# Altium PCB PCB_CSN_V5_dig.PcbDoc
Units mm, origin at the board's own origin, x right, y up, seen from the top; angles counter-clockwise.
Board outline 50 x 55 mm, 4 copper layers (Top Layer, GP1, PotSig, Bottom Layer); 50 components, 64 nets, 218 pads, 63 vias.
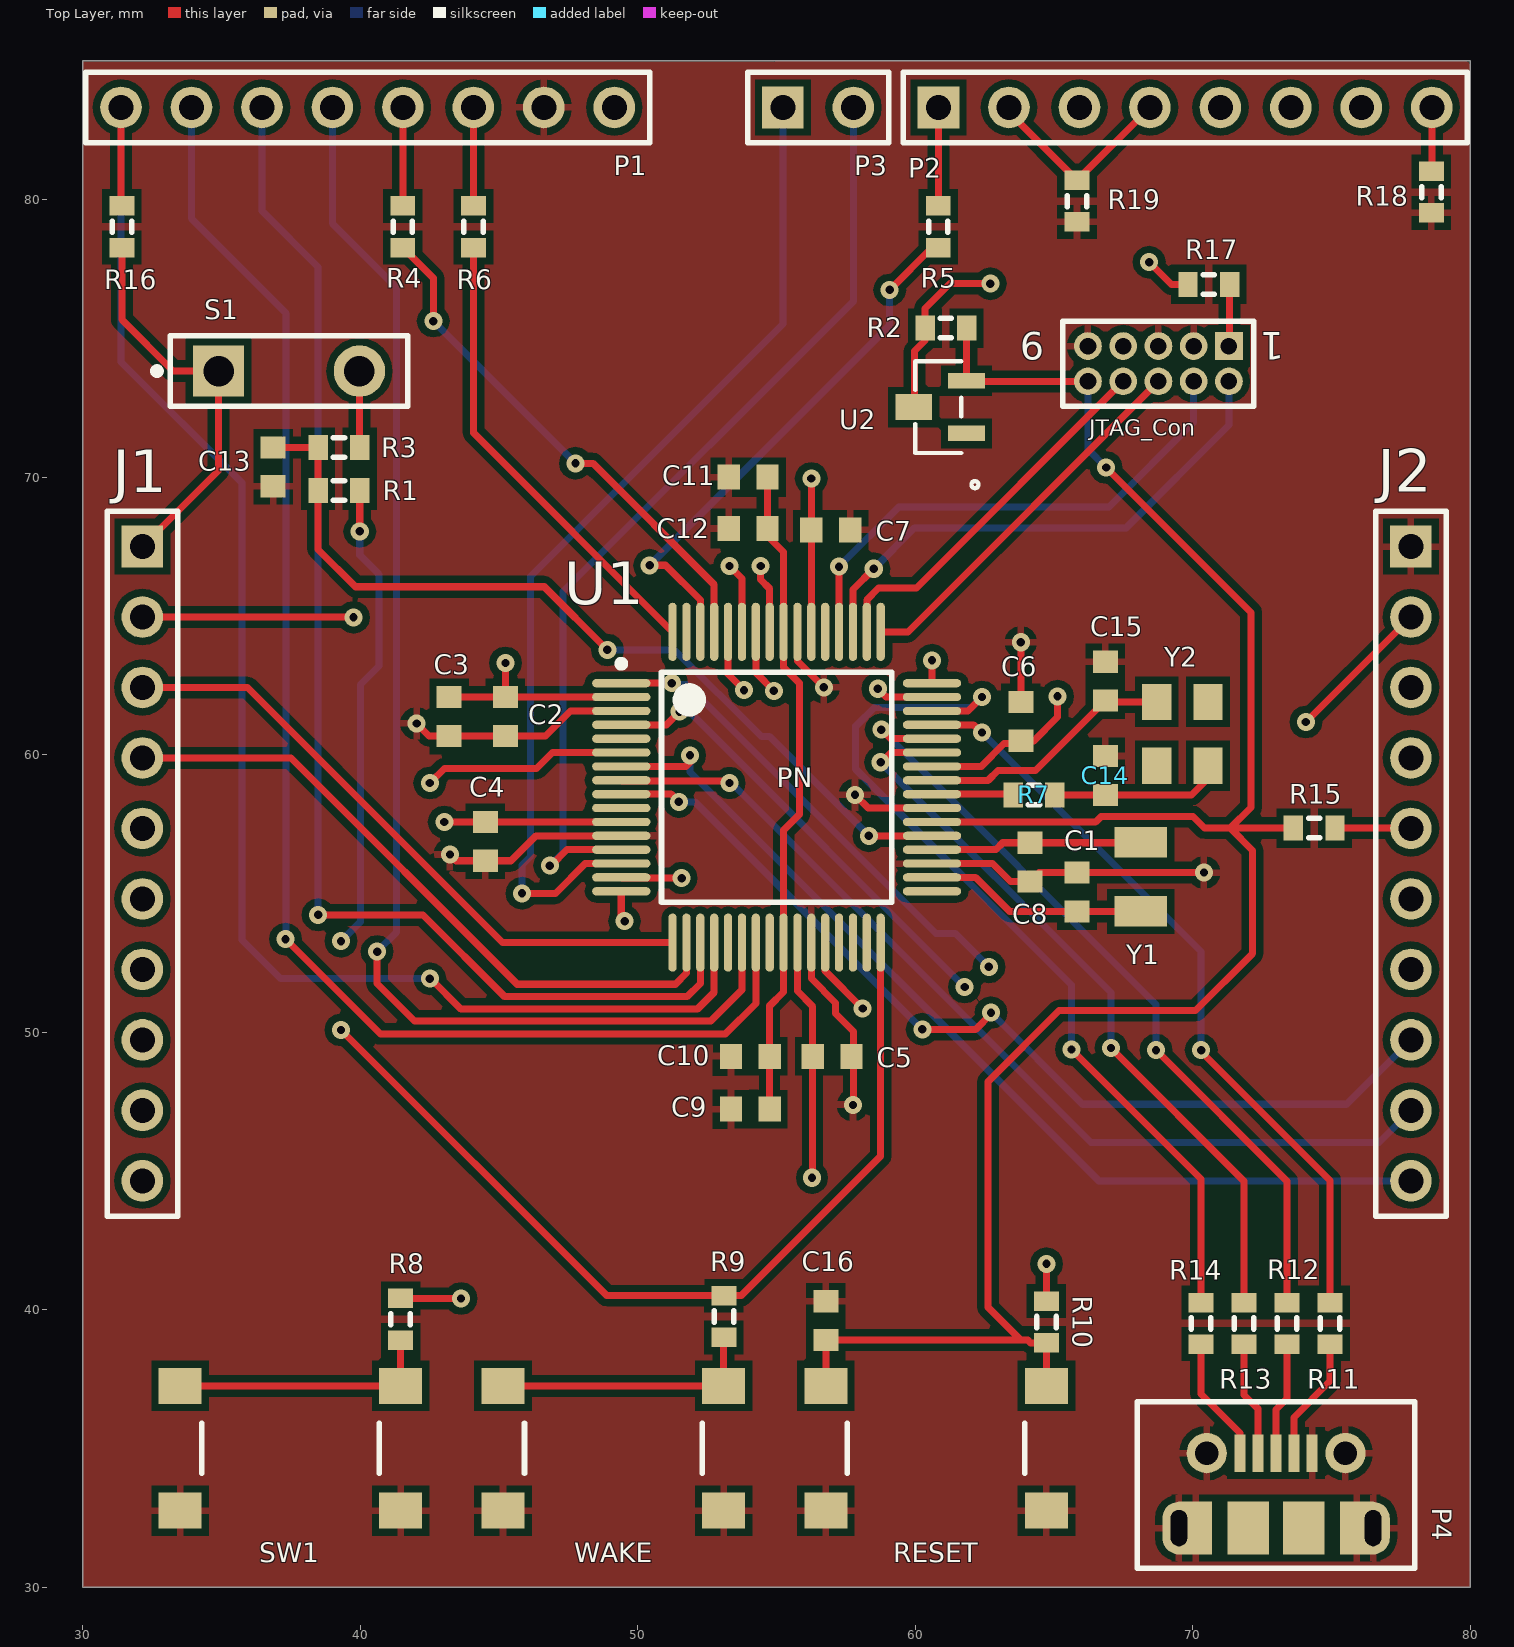
[diagram p0: Top Layer view]
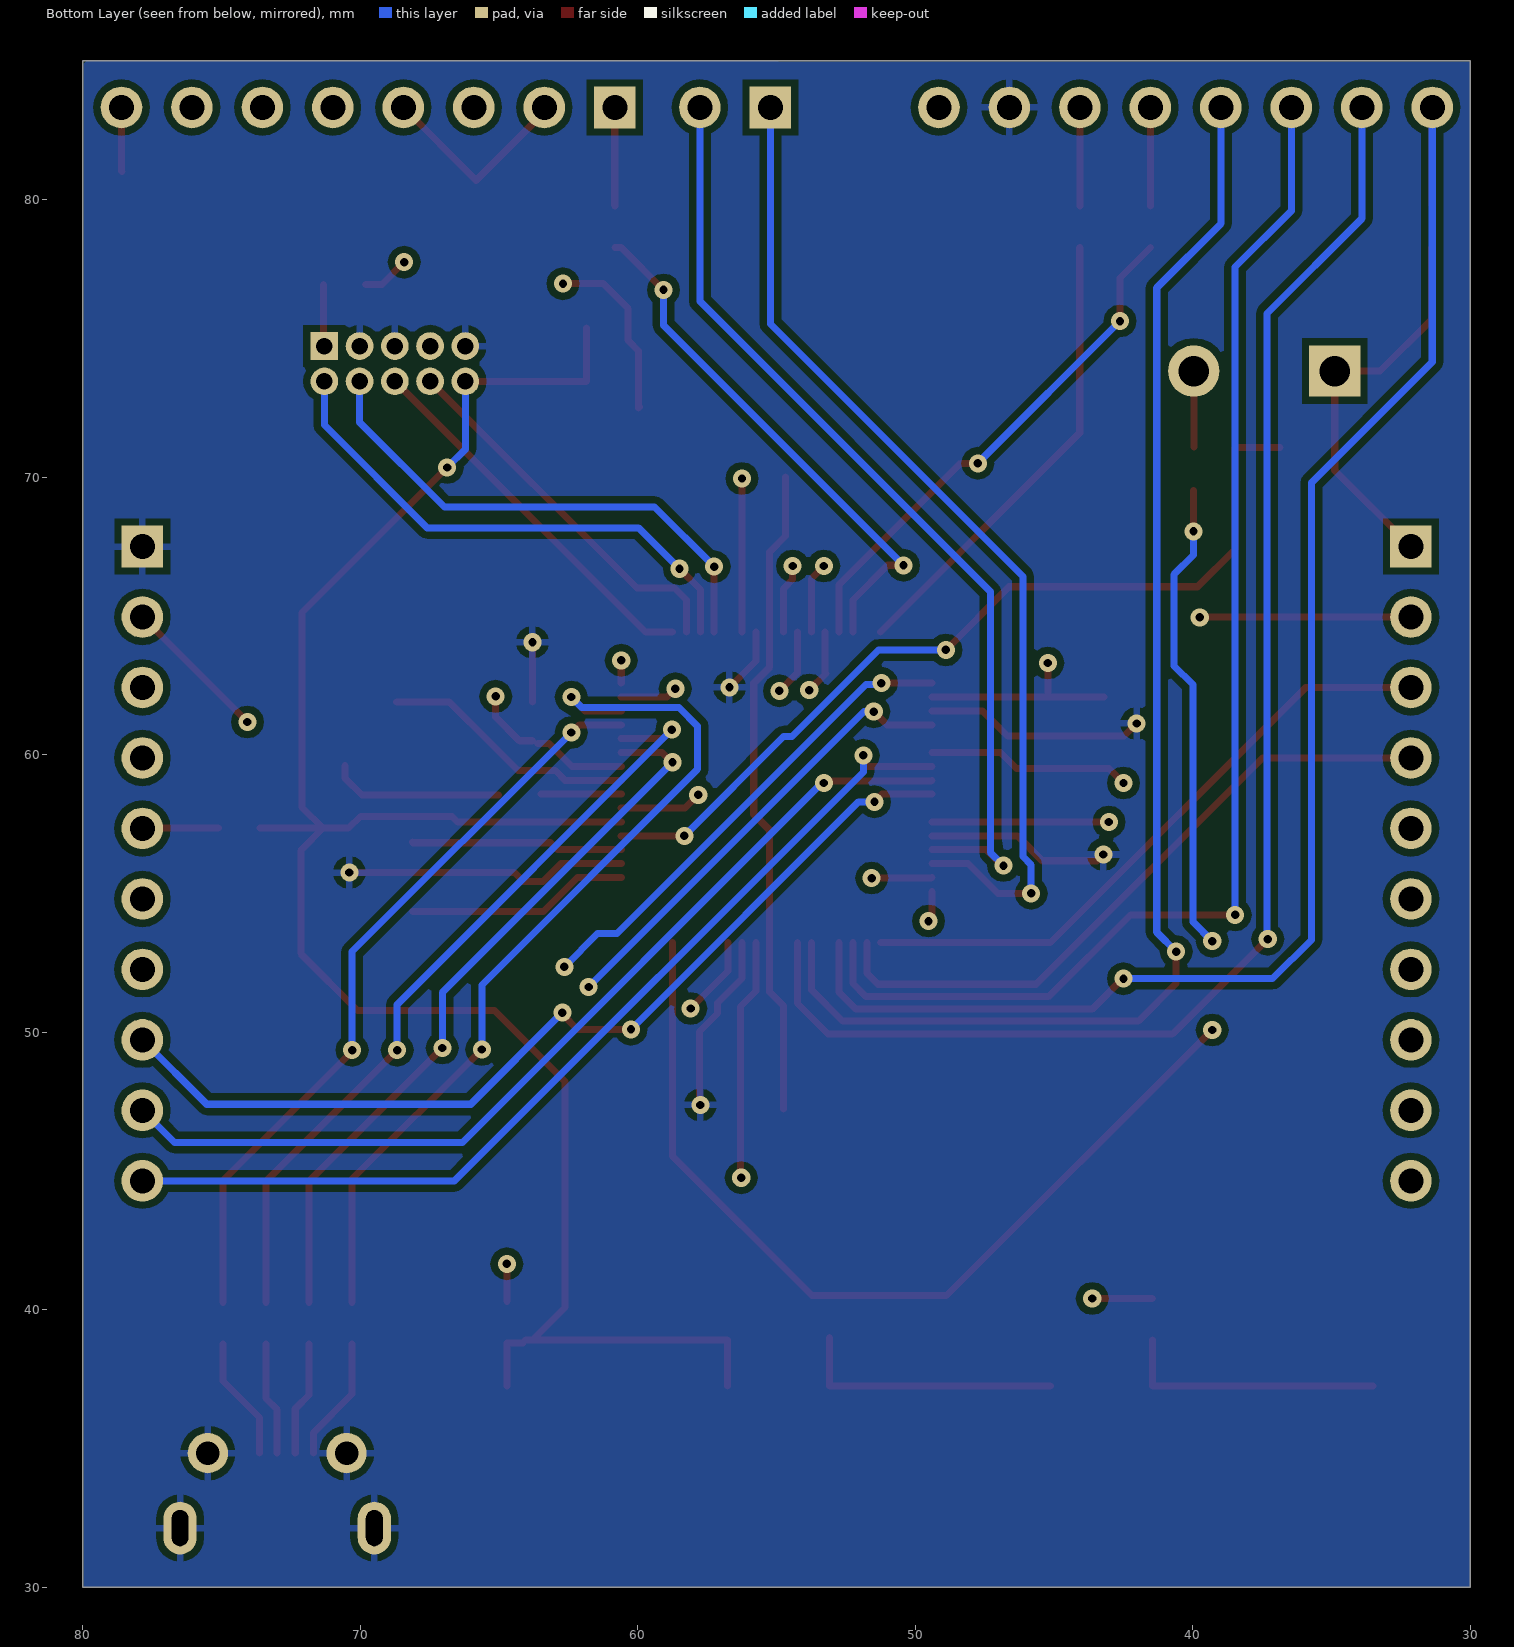
[diagram p1: Bottom Layer view, seen from below]
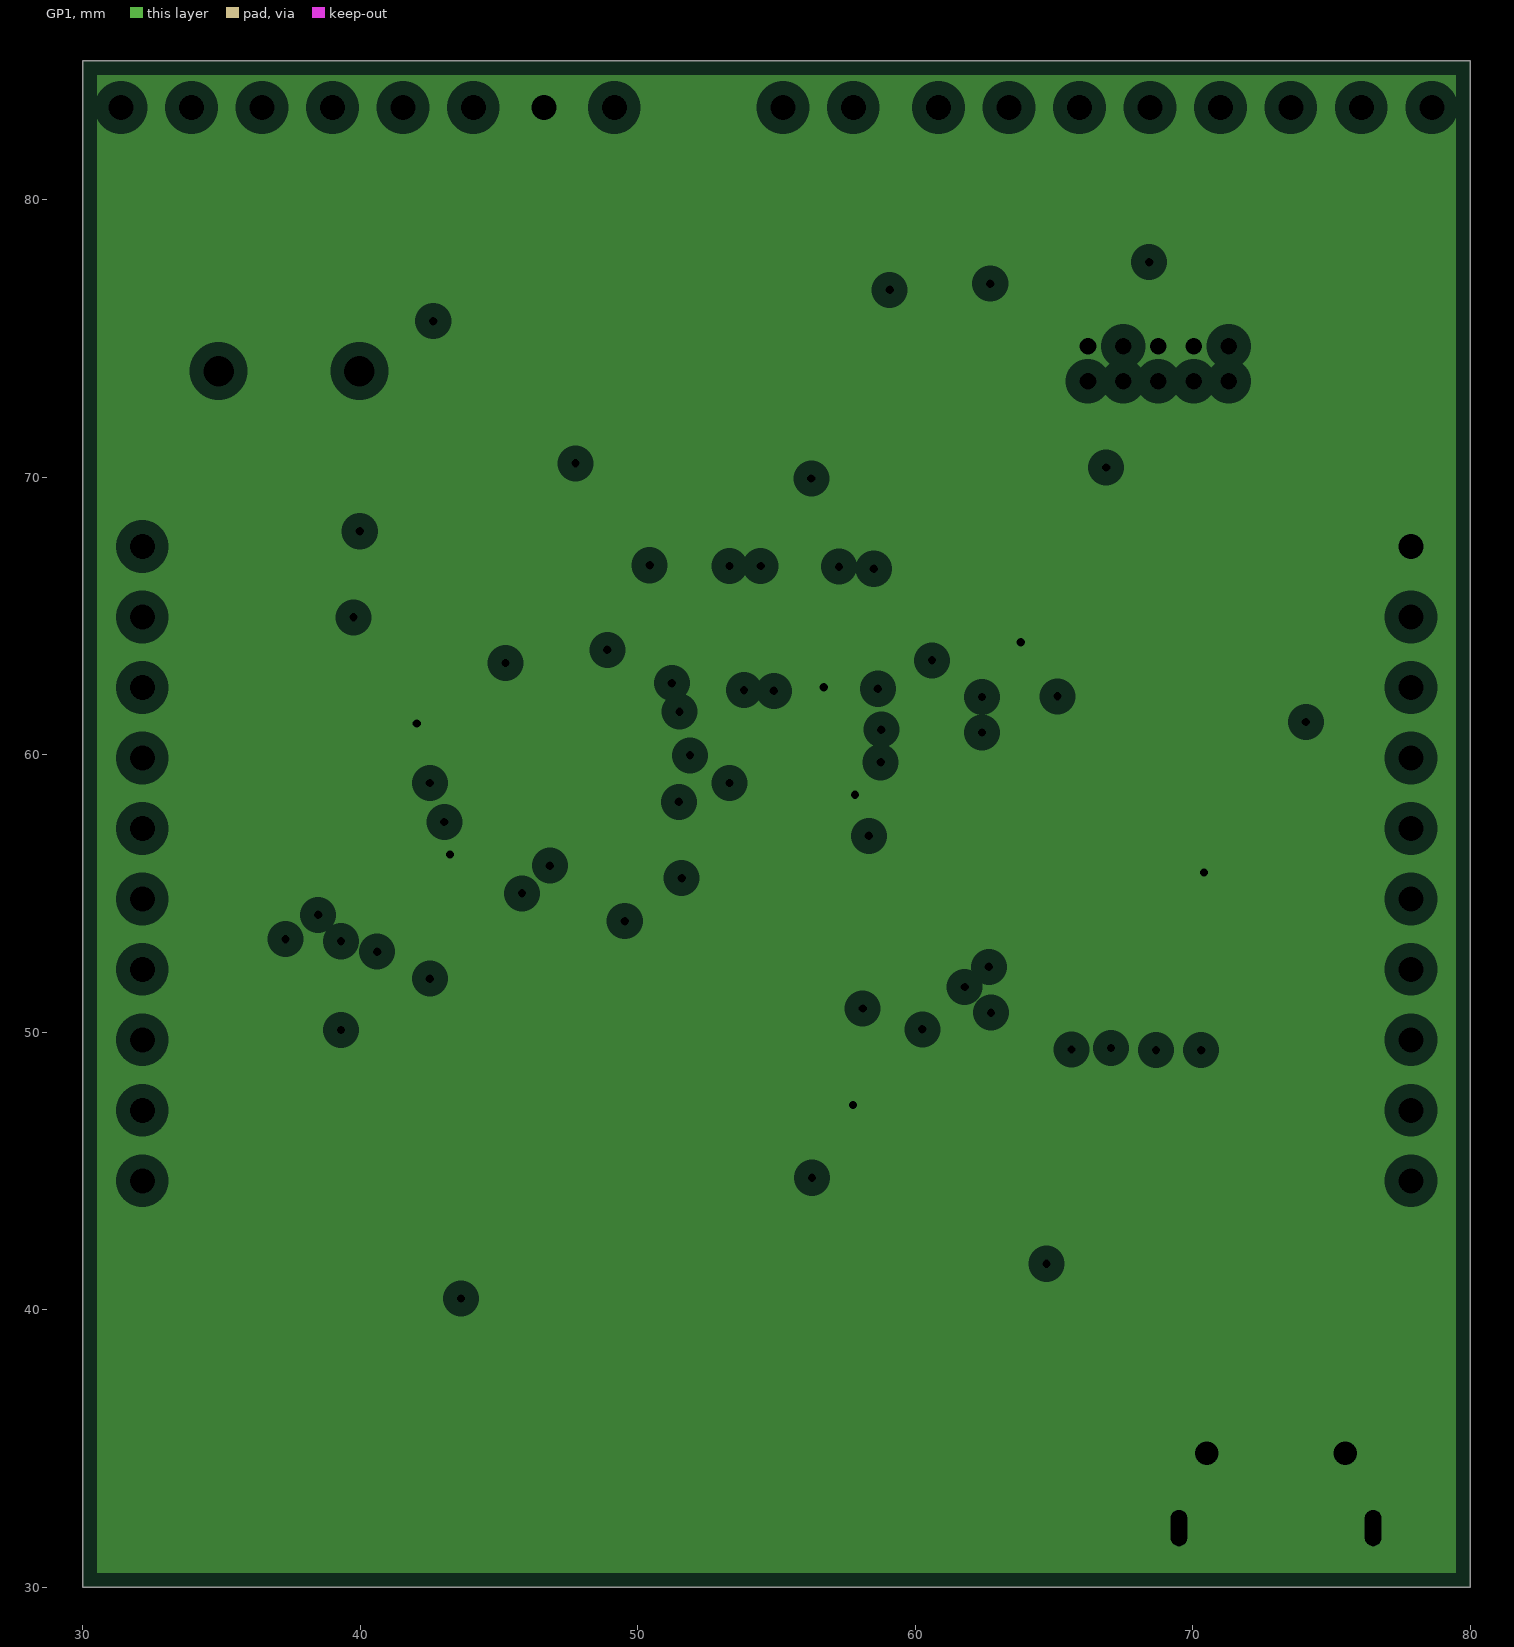
[diagram p2: GP1, clearances drawn from the general rule]
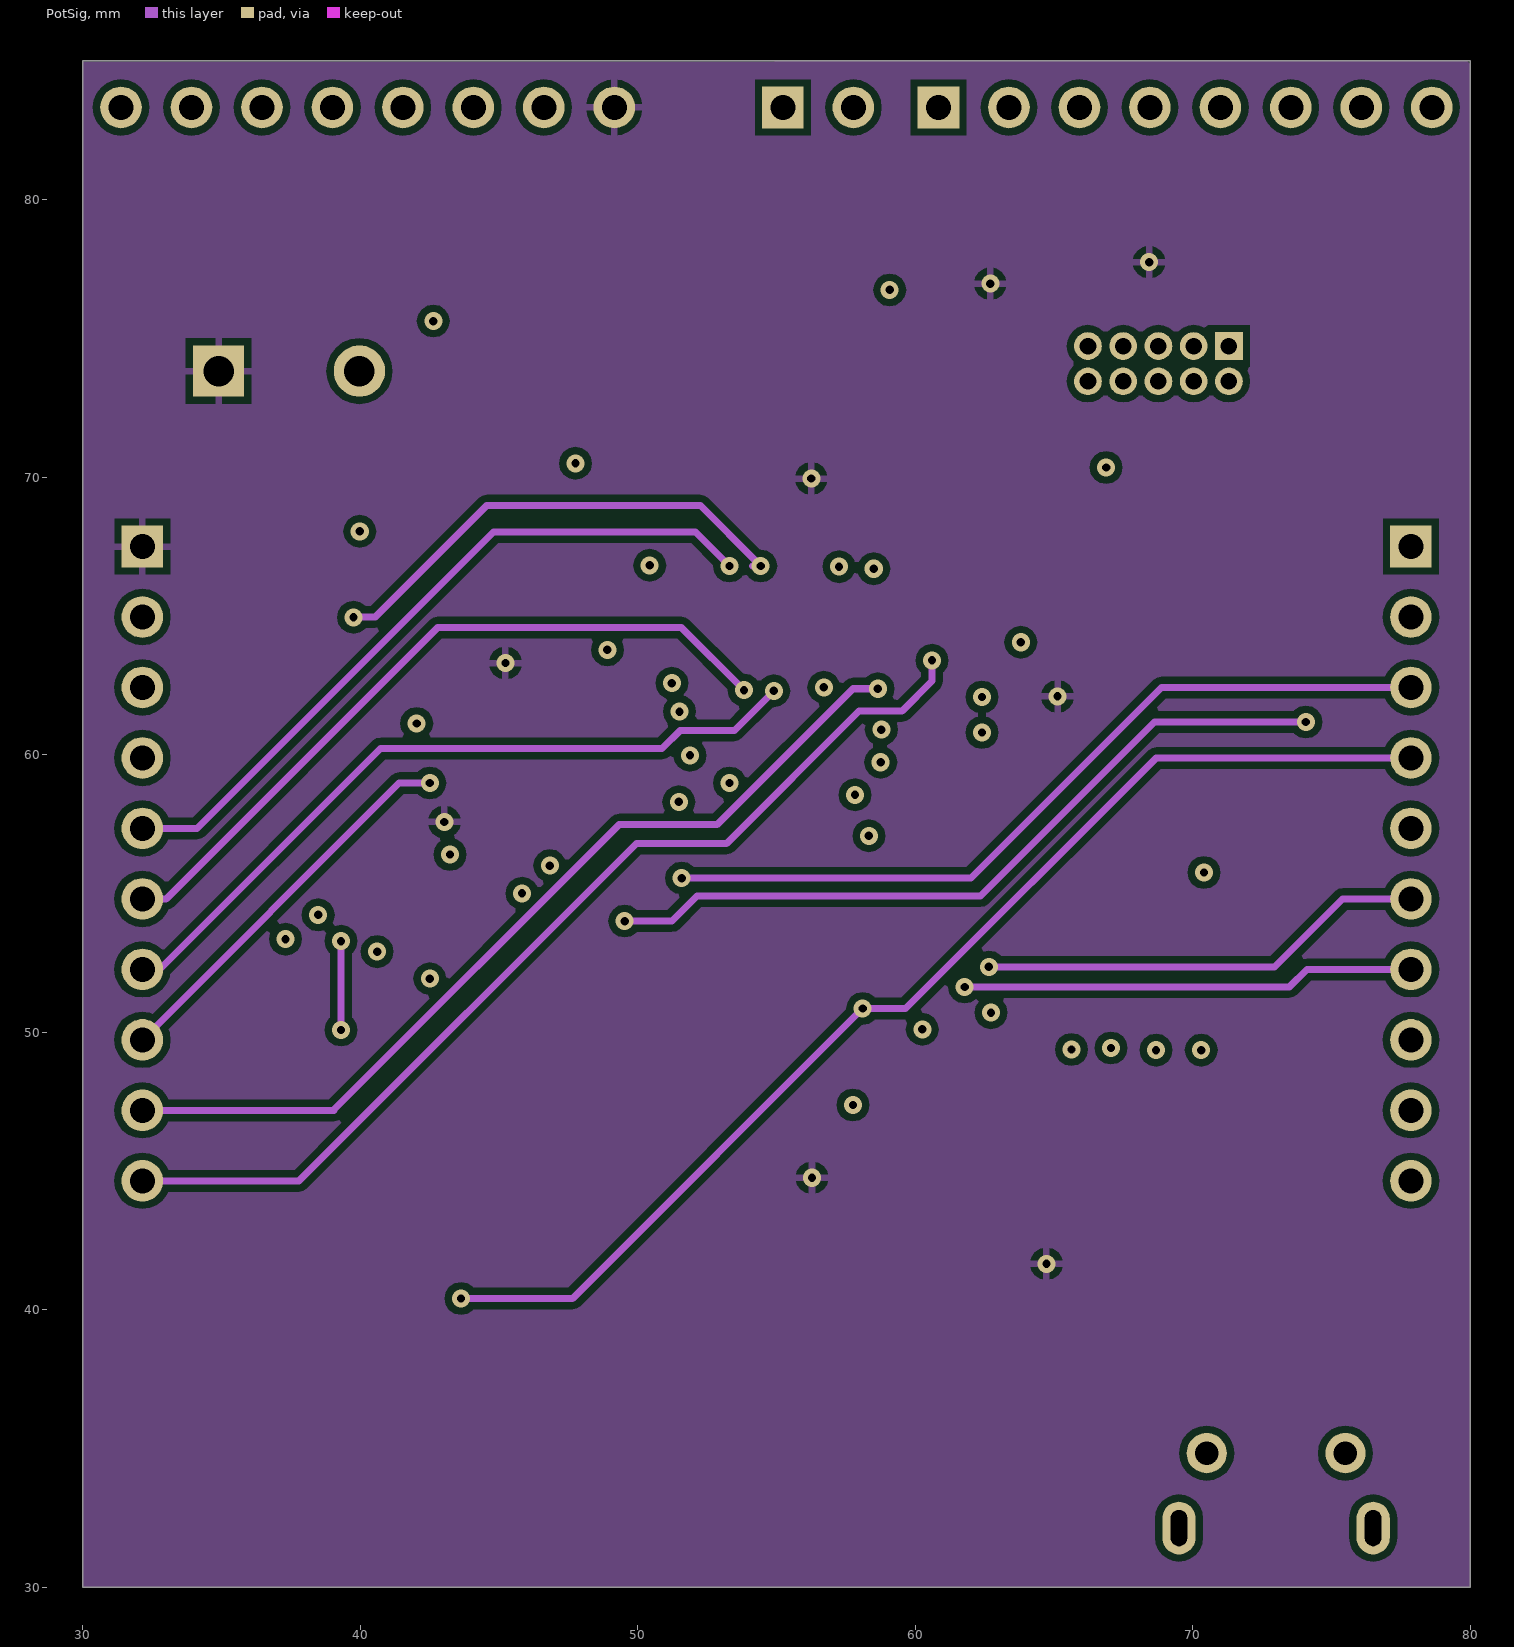
[diagram p3: PotSig]

## Layer stack, top to bottom
Top Layer: signal copper 0.0356
Dielectric: core 0.32, FR-4, Dk 4.8
GP1: plane copper 0.0356, net DGND
Dielectric: prepreg 0.32, FR-4, Dk 4.8
PotSig: signal copper 0.0356
Dielectric: core 0.32, FR-4, Dk 4.8
Bottom Layer: signal copper 0.0356

## Board outline
30,30 80,30 80,85 30,85

## Design rules (kind name [scope] priority, off if disabled: settings)
Clearance Clearance_1 [(InNamedPolygon('3.3Pot') OR InNamedPolygon('TopGnd')OR InNamedPolygon('BotGnd'))] p1: gap=0.254
Clearance [All] p2: gap=0.127
ComponentClearance ComponentClearance_1 [InComponentClass('Temp_Sens') vs InComponent('U1')] p1: gap=0 collisioncheckmode=3 verticalgap=0 showdistances=FALSE
ComponentClearance [All] p2: gap=0.254 collisioncheckmode=3 verticalgap=0.254 showdistances=FALSE
MinimumSolderMaskSliver MinimumSolderMaskSliver_1 [(HasFootprint('DRC10_2P4X1P65') OR HasFootprint('SOT23-5')OR HasFootPrint('USB_microB')OR HasFootPrint('PM0064A_M')OR HasFootPrint('MHDR2X5'))] p1: minsoldermaskwidth=0.06
MinimumSolderMaskSliver [All] p2: minsoldermaskwidth=0.127
PlaneClearance [All] p1: clearance=0.5
PlaneConnect [All] p1: planeconnectstyle=Relief reliefexpansion=0.508 reliefentries=4 reliefconductorwidth=0.254 reliefairgap=0.254
PolygonConnect [All] p1: connectstyle=Relief reliefconductorwidth=0.254 reliefentries=4 polygonreliefangle="90 Angle"
RoutingVias [All] p1: holewidth=0.3 width=0.65 viastyle="Through Hole" minholewidth=0.3 minwidth=0.65 maxholewidth=0.3 maxwidth=0.65
SilkscreenOverComponentPads SilkscreenOverComponentPads_1 [(InPadClass('Pads_Res_Cond') OR HasFootprint('6-0805_N') OR HasFootprint('J1-0603')OR HasFootPrint('SOT23-5')OR HasFootPrint('SPST-2')OR HasFootPrint('DBZ3')) vs (OnLayer('Top Overlay') OR OnLayer('Bottom Overlay'))] p1: minsilkscreentomaskgap=0.06
SilkscreenOverComponentPads [All] p2: minsilkscreentomaskgap=0.254
SolderMaskExpansion SolderMaskExpansion_1 [(HasFootprint('DRC10_2P4X1P65') OR HasFootprint('MAA05A_N')OR HasFootprint('USB_microB')OR HasFootprint('PM0064A_M')OR HasFootPrint('MHDR2X5'))] p1: expansion=0.05
SolderMaskExpansion [All] p2: expansion=0.102
Width Width_1 [(InNet('-5') OR InNet('+3.3') OR InNet('+5') OR InNet('70_GND') OR InNet('+70V') OR InNet('DGND') OR InNet('GND_Bat')OR InNet('+5_Pow') OR InNet('AGND')OR InNetClass('Potencia'))] p1: maxlimit=1 minlimit=0.254 preferedwidth=1 toplayer_maxwidth=0.254 toplayer_prefwidth=0.254 midlayer1_minwidth=1 bottomlayer_minwidth=0.5 bottomlayer_maxwidth=0.5 bottomlayer_prefwidth=0.5 minimp=50.000000 maximp=50.000000 favimp=50.000000
Width [All] p2: maxlimit=0.254 minlimit=0.254 preferedwidth=0.254
23 further rules are at their usual default settings.

## Components (designator, comment, footprint, x,y, rotation, side; value= is the part's Value field where it differs from the comment)
C1 "Cap" 1608[0603] 65.825,55.05 r270 top
C2 "Cap" 1608[0603] 45.225,61.375 r90 top
C3 "Cap" 1608[0603] 43.2,61.375 r90 top
C4 "Cap" 1608[0603] 44.5,56.875 r90 top
C5 "Cap" 1608[0603] 57,49.125 r180 top
C6 "Cap" 1608[0603] 63.8,61.2 r270 top
C7 "Cap" 1608[0603] 56.95,68.1 r180 top
C8 "Cap" 1608[0603] 64.125,56.125 r90 top
C9 "Cap" 1608[0603] 54.05,47.225 r0 top
C10 "Cap" 1608[0603] 54.05,49.125 r0 top
C11 "Cap" 1608[0603] 53.975,70 r0 top
C12 "Cap" 1608[0603] 53.975,68.15 r0 top
C13 "Cap" 1608[0603] 36.85,70.375 r90 top
C14 "Cap" 1608[0603] 66.85,59.25 r270 top
C15 "Cap" 1608[0603] 66.85,62.65 r270 top
C16 "Cap" 1608[0603] 56.775,39.6 r90 top
J1 "Header 10" HDR1X10 32.14,67.5 r270 top
J2 "Header 10" HDR1X10 77.86,67.5 r270 top
JTAG_Con "MHDR2X5" MHDR2X5 71.3,74.725 r180 top
P1 "Header 8" HDR1X8#1 31.37,83.325 r0 top
P2 "Header 8" HDR1X8#2 60.834,83.325 r0 top
P3 "Header 2" HDR1X2 55.226,83.325 r0 top
P4 "USB_microB" USB_microB 73,30.675 r0 top
R1 "Res3" J1-0603 39.225,69.525 r180 top
R2 "Res3" J1-0603 61.1,75.375 r180 top
R3 "Res3" J1-0603 39.225,71.075 r180 top
R4 "Res3" J1-0603 41.525,79.025 r90 top
R5 "Res3" J1-0603 60.825,79.025 r90 top
R6 "Res3" J1-0603 44.075,79.025 r90 top
R7 "Res3" J1-0603 64.275,58.55 r180 top
R8 "Res3" J1-0603 41.45,39.65 r270 top
R9 "Res3" J1-0603 53.1,39.75 r270 top
R10 "Res3" J1-0603 64.725,39.55 r90 top
R11 "Res3" J1-0603 74.95,39.5 r270 top
R12 "Res3" J1-0603 73.4,39.5 r270 top
R13 "Res3" J1-0603 71.85,39.5 r270 top
R14 "Res3" J1-0603 70.3,39.5 r270 top
R15 "Res3" J1-0603 74.375,57.35 r180 top
R16 "Res3" J1-0603 31.4,79.025 r270 top
R17 "Res3" J1-0603 70.575,76.95 r180 top
R18 "Res3" J1-0603 78.6,80.275 r270 top
R19 "Res3" J1-0603 65.825,79.95 r270 top
RESET "SW-PB-4" "Swtich 6x6 SMD" 60.75,35 r180 top (schematic designator S4)
S1 "SW-PB" SPST-2 37.425,73.825 r0 top
SW1 "SW-PB-4" "Swtich 6x6 SMD" 37.475,35 r180 top
U1 "TM4C123GH6PMT7R" PM0064A_M 55,58.825 r0 top
U2 "TLV803MDBZR" DBZ3 60.825,72.525 r90 top
WAKE "SW-PB-4" "Swtich 6x6 SMD" 49.112,35 r180 top
Y1 "XTAL" Osc_ABS07 68.125,55.6 r90 top
Y2 "XTAL" Osc_ABM8 69.625,60.75 r90 top

## Footprints (in the part's own frame and the unit in brackets; to place one, negate y for a bottom-side part, rotate by r counter-clockwise, add the part's x,y. Pads: shape width x height; smd on the part's side, far side on the other; paste and mask are expansions set on the pad)
1608[0603] [mm] "Chip Capacitor, Body 1.6x0.8mm, IPC High Density"
  rect 0.8x0.9 smd: 1(-0.7,0) 2(0.7,0)
  body extent -0.87,-0.48 0.87,0.48, height 1.3
DBZ3 [mil]
  rect 22x52 smd: 1(-37.4,-40) 2(37.4,-40)
  rect 37x52 smd: 3(0,34.75)
  silkscreen extent -115,-57 65,32
HDR1X2 [mm] "Connector; Header; 2 Position"
  rect 1.5x1.5 hole 0.9: 1(0,0)
  round 1.5 hole 0.9: 2(2.54,0)
  silkscreen extent -1.27,-1.27 3.81,1.27
HDR1X8#1 [mm] "Connector; Header; 8 Position"
  round 1.5 hole 0.9: 1(0,0) 2(2.54,0) 3(5.08,0) 4(7.62,0) 5(10.16,0) 6(12.7,0) 7(15.24,0) 8(17.78,0)
  silkscreen extent -1.27,-1.27 19.05,1.27
HDR1X8#2 [mm] "Connector; Header; 8 Position"
  rect 1.5x1.5 hole 0.9: 1(0,0)
  round 1.5 hole 0.9: 2(2.54,0) 3(5.08,0) 4(7.62,0) 5(10.16,0) 6(12.7,0) 7(15.24,0) 8(17.78,0)
  silkscreen extent -1.27,-1.27 19.05,1.27
HDR1X10 [mm] "Connector; Header; 10 Position"
  rect 1.5x1.5 hole 0.9: 1(0,0)
  round 1.5 hole 0.9: 2(2.54,0) 3(5.08,0) 4(7.62,0) 5(10.16,0) 6(12.7,0) 7(15.24,0) 8(17.78,0) 9(20.32,0) 10(22.86,0)
  silkscreen extent -1.27,-1.27 24.13,1.27
J1-0603 [mm] "Chip Resistor, Body 1.6x0.8mm, IPC High Density"
  rect 0.7x0.9 smd: 1(-0.75,0) 2(0.75,0)
  silkscreen extent -0.2,-0.35 0.2,0.35, body extent -0.85,-0.48 0.85,0.48, height 0.9
MHDR2X5 [mm] "Connector; Header; 5x2 Position"
  rect 1x1 hole 0.6: 1(0,0)
  round 1 hole 0.6: 2(0,1.27) 3(1.27,0) 4(1.27,1.27) 5(2.54,0) 6(2.54,1.27) 7(3.81,0) 8(3.81,1.27) 9(5.08,0) 10(5.08,1.27)
  silkscreen extent -0.9,-0.9 5.98,2.17
Osc_ABM8 [mm]
  rect 1.3x1.05 smd: 1(-1.15,-0.925) 2(1.15,0.925) 3(1.15,-0.925) 4(-1.15,0.925)
Osc_ABS07 [mm]
  rect 1.1x1.9 smd: 1(-1.25,0) 2(1.25,0)
PM0064A_M [mm]
  oval 2.1x0.3 smd paste-0.102 mask+0.051: 1(-5.6,3.75) 2(-5.6,3.25) 3(-5.6,2.75) 4(-5.6,2.25) 5(-5.6,1.75) 6(-5.6,1.25) 7(-5.6,0.75) 8(-5.6,0.25) 9(-5.6,-0.25) 10(-5.6,-0.75) 11(-5.6,-1.25) 12(-5.6,-1.75) 13(-5.6,-2.25) 14(-5.6,-2.75) 15(-5.6,-3.25) 16(-5.6,-3.75) 33(5.6,-3.75) 34(5.6,-3.25) 35(5.6,-2.75) 36(5.6,-2.25) 37(5.6,-1.75) 38(5.6,-1.25) 39(5.6,-0.75) 40(5.6,-0.25) 41(5.6,0.25) 42(5.6,0.75) 43(5.6,1.25) 44(5.6,1.75) 45(5.6,2.25) 46(5.6,2.75) 47(5.6,3.25) 48(5.6,3.75)
  oval 0.3x2.1 smd paste-0.102 mask+0.051: 17(-3.75,-5.6) 18(-3.25,-5.6) 19(-2.75,-5.6) 20(-2.25,-5.6) 21(-1.75,-5.6) 22(-1.25,-5.6) 23(-0.75,-5.6) 24(-0.25,-5.6) 25(0.25,-5.6) 26(0.75,-5.6) 27(1.25,-5.6) 28(1.75,-5.6) 29(2.25,-5.6) 30(2.75,-5.6) 31(3.25,-5.6) 32(3.75,-5.6) 49(3.75,5.6) 50(3.25,5.6) 51(2.75,5.6) 52(2.25,5.6) 53(1.75,5.6) 54(1.25,5.6) 55(0.75,5.6) 56(0.25,5.6) 57(-0.25,5.6) 58(-0.75,5.6) 59(-1.25,5.6) 60(-1.75,5.6) 61(-2.25,5.6) 62(-2.75,5.6) 63(-3.25,5.6) 64(-3.75,5.6)
  silkscreen extent -5.72,-4.15 4.15,4.57
SPST-2 [mm] "Switch; 2 Leads"
  rect 1.85x1.85 hole 1.1: 1(-2.54,0)
  round 1.85 hole 1.1: 2(2.54,0)
  silkscreen extent -4.89,-1.27 4.28,1.27
"Swtich 6x6 SMD" [mm] "Switch 4 leads 6 x 6 mm, SMD"
  rect 1.55x1.3 smd: 1(-3.975,-2.25) 2(3.975,-2.25) 3(3.975,2.25) 4(-3.975,2.25)
  silkscreen extent -3.2,-0.9 3.2,0.9
USB_microB [mm]
  rect 0.4x1.35 smd: 1(-1.3,4.15) 2(-0.65,4.15) 3(0,4.15) 4(0.64,4.15) 5(1.3,4.15)
  round 1.45 hole 0.85: 6(-2.5,4.15) 7(2.5,4.15)
  oval 1.2x1.9 hole 0.6 slot 1.3 at 90 deg: 8(-3.5,1.45) 9(3.5,1.45)
  rect 1.2x1.9 smd: 8(-2.9,1.45) 9(2.9,1.45)
  rect 1.5x1.9 smd: ""(-1,1.45) ""(1,1.45)
  silkscreen extent -5,0 5,6

## Part data
C1 C2 C3 C4 C5 C6 C7 C8 C9 C10 C11 C12 C13 C14 C15 C16: "Capacitor"
J1 J2: "Header, 10-Pin"
JTAG_Con: "Header, 5-Pin, Dual row"
P1 P2: "Header, 8-Pin"
P3: "Header, 2-Pin"
R1 R2 R3 R4 R5 R6 R7 R8 R9 R10 R11 R12 R13 R14 R15 R16 R17 R18 R19: "Resistor"
RESET S1 SW1 WAKE: "Switch"
U1 U2: "Imported"
Y1 Y2: "Crystal Oscillator"

## Via types
v1: diameter 0.65, hole 0.3, Top Layer to Bottom Layer, 63 vias

## Nets (pads, with @x,y where several pads share a name; then routed paths per layer and width w, separated by ;. In a path a pad name is that pad's centre, name@x,y a point inside that pad or via, vN(x,y) a via of type N, cw(c..) or ccw(c..) an arc to the next point about the centre after c; other vN are vias at no path point)
70_GND: P2.8 R18.1 | length 2.3
  Top Layer w0.254: R18.1 78.614,81.039 P2.8
+3.3: C2.2 C3.2 C4.2 C5.2 C6.2 C7.2 J1.1 P1.8 R2.2 R10.2 R16.2 R17.2 S1.1 U1.2 U1.11 U1.26 U1.42 U1.54 U2.3 | length 57.7
  Top Layer w0.254: R16.2 31.4,75.675 33.25,73.825 S1.1 34.885,70.245 J1.1 ; v1(43.025,57.575) C4.2 U1.11 ; C3.2 C2.2 ; v1(45.225,63.3) C2.2 ; U1.2 C2.2 ; U1.26 55.75,51.475 56.3,50.925 ; U1.54 C7.2 v1@56.25,70 ; v1(56.275,44.75) 56.3,44.775 C5.2 56.3,50.9 ; U2.3 U2.3@59.942,72.533 ; U2.3@59.975,72.5 59.975,72.525 59.975,74.55 60.35,74.925 R2.2 60.35,76.075 61.25,76.975 v1(62.7,76.975) ; U1.42 62.375,59.575 63.2,60.4 C6.2@63.625,60.4 ; C6.2 64.275,60.5 65.125,61.35 v1(65.125,62.1) ; R10.2 v1(64.725,41.65) ; v1(68.425,77.75) 69.225,76.95 R17.2
  other v1: 56.25,69.95
+5: P2.5
+70V: P2.7
-5: P2.6
AGND: P2.2 P2.4 R19.1 | length 7.4
  Top Layer w0.254: P2.2 63.374,83.151 R19.1 65.829,80.7 P2.4
DGND: C1.1 C2.1 C3.1 C4.1 C5.1 C6.1 C7.1 C8.1 C9.1 C10.1 C11.1 C12.1 C13.1 C14.1 C15.1 C16.2 J2.1 JTAG_Con.3 JTAG_Con.5 JTAG_Con.9 P1.7 P4.5 P4.6 P4.7 P4.8 P4.9 R18.2 R19.2 RESET.3 RESET.4 SW1.3 SW1.4 U1.3 U1.12 U1.27 U1.35 U1.39 U1.55 WAKE.3 WAKE.4 | length 39.1
  Top Layer w0.254: v1(42.025,61.125) 42.475,60.675 C3.1 C2.1 46.675,60.675 47.575,61.575 U1.3 ; v1(43.225,56.4) 43.45,56.175 45.425,56.175 46.325,57.075 U1.12 ; U1.55 55.75,63.375 v1@56.775,62.35 ; U1.27 56.25,51.925 57.125,51.05 57.125,50.675 57.775,50.025 57.775,47.525 57.625,47.375 v1(57.75,47.375) ; v1(57.825,58.55) 58.3,58.075 U1.39 ; U1.35 62.775,56.075 63.425,55.425 C8.1 64.45,55.75 C1.1 v1(70.4,55.75) ; C6.1 v1(63.8,64.05)
  other v1: 56.7,62.425
GND: U2.1
NetC1_2: C1.2 U1.34 Y1.1 | length 8
  Top Layer w0.254: U1.34 62.175,55.575 63.4,54.35 C1.2 Y1.1
NetC8_2: C8.2 U1.36 Y1.2 | length 7.6
  Top Layer w0.254: U1.36 62.9,56.575 63.15,56.825 C8.2 68.1,56.825 Y1.2
NetC9_2: C9.2 C10.2 C11.2 C12.2 U1.25 U1.56 | length 23.6
  Top Layer w0.254: C11.2 C12.2 54.675,67.875 55.25,67.3 U1.56 55.25,63.15 55.825,62.575 55.825,57.85 55.25,57.275 U1.25 55.25,51.45 54.75,50.95 ; C9.2 C10.2 54.75,50.9
NetC13_2: C13.2 R1.2 R3.2 U1.37 | length 31.7
  Top Layer w0.254: C13.2 R3.2 R1.2 38.475,67.4 39.825,66.05 46.625,66.05 v1(48.9,63.775) ; v1(58.325,57.075) U1.37
  Bottom Layer w0.254: v1(48.9,63.775) 51.325,63.775 54.45,60.65 54.75,60.65 v1(58.325,57.075)
NetC14_2: C14.2 R7.1 Y2.1 | length 6.2
  Top Layer w0.254: R7.1 C14.2 69.95,58.55 70.55,59.15 Y2.1
NetC15_2: C15.2 U1.41 Y2.2 | length 9.3
  Top Layer w0.254: U1.41 62.625,59.075 62.975,59.425 64.325,59.425 65.3,60.4 66.8,61.9 Y2.2
NetC16_1: C16.1 JTAG_Con.10 R2.1 R10.1 R15.2 RESET.1 RESET.2 U1.38 U2.2 | length 75.7
  Top Layer w0.254: RESET.2 C16.1 63.8,38.9 ; U1.38 66.5,57.575 66.7,57.775 70,57.775 70.425,57.35 71.35,57.35 ; R2.1 61.85,73.466 61.861,73.455 JTAG_Con.10 ; RESET.1 R10.1 64.15,38.8 64.05,38.9 63.8,38.9 ; v1(66.875,70.35) 72.1,65.125 72.1,58.1 71.35,57.35 ; R15.2 71.35,57.35 ; 63.8,38.9 62.625,40.075 62.625,48.225 65.175,50.775 70.1,50.775 72.15,52.825 72.15,56.55 71.35,57.35
  Bottom Layer w0.254: JTAG_Con.10 66.22,71.005 v1(66.875,70.35)
NetJ1_2: J1.2 U1.57 | length 27.1
  Top Layer w0.254: J1.2 v1@39.75,64.96 ; v1@54.425,66.499 54.425,66.306 54.75,65.981 U1.57
  PotSig w0.254: v1@39.75,64.96 40.535,64.96 44.55,68.975 52.25,68.975 v1@54.275,66.95 ; v1@54.124,66.8 v1(54.425,66.8)
  other v1: 39.75,64.95
NetJ1_3: J1.3 U1.17 | length 22.9
  Top Layer w0.254: J1.3 35.93,62.42 45.125,53.225 U1.17
NetJ1_4: J1.4 U1.18 | length 24.3
  Top Layer w0.254: J1.4 37.495,59.88 45.65,51.725 51.35,51.725 51.75,52.125 U1.18
NetJ1_5: J1.5 U1.59 | length 28.7
  Top Layer w0.254: v1(53.3,66.8) 53.75,66.35 U1.59
  PotSig w0.254: J1.5 34.115,57.34 44.8,68.025 52.075,68.025 v1(53.3,66.8)
NetJ1_6: J1.6 U1.60 | length 29
  Top Layer w0.254: U1.60 53.25,62.95 53.225,62.925 v1(53.825,62.325)
  PotSig w0.254: J1.6 33,54.8 42.775,64.575 51.575,64.575 v1(53.825,62.325)
NetJ1_7: J1.7 U1.58 | length 29.3
  Top Layer w0.254: U1.58 54.25,62.95 v1(54.9,62.3)
  PotSig w0.254: J1.7 32.76,52.26 40.725,60.225 50.875,60.225 51.525,60.875 53.475,60.875 v1(54.9,62.3)
NetJ1_8: J1.8 U1.6 | length 21.5
  Top Layer w0.254: v1(42.5,58.975) 43.025,59.5 46.35,59.5 46.925,60.075 U1.6
  PotSig w0.254: J1.8 41.395,58.975 v1(42.5,58.975)
NetJ1_9: J1.9 U1.47 | length 34.9
  Top Layer w0.254: v1(58.65,62.375) 58.95,62.075 U1.47
  PotSig w0.254: J1.9 39.05,47.18 39.05,47.205 49.32,57.475 52.85,57.475 57.75,62.375 v1(58.65,62.375)
NetJ1_10: J1.10 U1.48 | length 37.5
  Top Layer w0.254: U1.48 v1(60.6,63.4)
  PotSig w0.254: J1.10 37.79,44.64 49.95,56.8 53.2,56.8 57.975,61.575 59.525,61.575 60.6,62.65 v1(60.6,63.4)
NetJ2_2: J2.2 U1.16 | length 34
  Top Layer w0.254: U1.16 49.4,54.125 v1(49.525,54) ; v1(74.075,61.175) J2.2
  PotSig w0.254: v1(49.525,54) 51.225,54 52.125,54.9 62.35,54.9 68.625,61.175 v1(74.075,61.175)
NetJ2_3: J2.3 U1.15 | length 31.3
  Top Layer w0.254: U1.15 49.425,55.55 v1(51.575,55.55)
  PotSig w0.254: v1(51.575,55.55) 62,55.55 68.87,62.42 J2.3
NetJ2_4: J2.4 R8.1 U1.28 | length 47.4
  Top Layer w0.254: R8.1 v1(43.625,40.4) ; U1.28 56.75,52.2 v1(58.1,50.85)
  PotSig w0.254: v1(43.625,40.4) 47.65,40.4 v1(58.1,50.85) 59.65,50.85 68.68,59.88 J2.4
NetJ2_5: J2.5 R15.1 | length 2.7
  Top Layer w0.254: R15.1 77.85,57.35 J2.5
NetJ2_6: J2.6 U1.1 | length 33.7
  Top Layer w0.254: U1.1 v1(51.225,62.575)
  PotSig w0.254: v1(62.65,52.35) 72.95,52.35 75.4,54.8 J2.6
  Bottom Layer w0.254: v1(51.225,62.575) 51.275,62.525 51.775,62.525 60.75,53.55 61.45,53.55 v1(62.65,52.35)
NetJ2_7: J2.7 U1.4 | length 33
  Top Layer w0.254: U1.4 51.025,61.075 v1(51.5,61.55)
  PotSig w0.254: v1(61.775,51.625) 73.475,51.625 74.11,52.26 J2.7
  Bottom Layer w0.254: v1(51.5,61.55) 51.85,61.55 v1(61.775,51.625)
NetJ2_8: J2.8 U1.9 | length 34.6
  Top Layer w0.254: U1.9 51.2,58.575 v1(51.475,58.3) ; v1(60.25,50.1) 62.175,50.1 62.725,50.65 v1(62.725,50.7)
  Bottom Layer w0.254: v1(51.475,58.3) 52.05,58.3 v1(60.25,50.1) ; v1(62.725,50.7) 66.025,47.4 75.54,47.4 J2.8
NetJ2_9: J2.9 U1.8 | length 34.5
  Top Layer w0.254: U1.8 49.425,59.05 53.3,59.05 v1(53.3,58.975)
  Bottom Layer w0.254: v1(53.3,58.975) 53.3,59.05 66.325,46.025 76.705,46.025 J2.9
NetJ2_10: J2.10 U1.7 | length 35.5
  Top Layer w0.254: U1.7 51.725,59.575 51.875,59.725 v1(51.875,59.975)
  Bottom Layer w0.254: v1(51.875,59.975) 51.875,59.375 66.61,44.64 J2.10
NetJTAG_Con_1: JTAG_Con.1 R17.1 | length 2.2
  Top Layer w0.254: JTAG_Con.1 71.325,74.75 R17.1
NetJTAG_Con_2: JTAG_Con.2 U1.51 | length 19.1
  Top Layer w0.254: U1.51 57.75,65.95 v1(58.5,66.7)
  Bottom Layer w0.254: v1(58.5,66.7) 59.975,68.175 67.6,68.175 71.3,71.875 JTAG_Con.2
NetJTAG_Con_4: JTAG_Con.4 U1.52 | length 18.8
  Top Layer w0.254: U1.52 v1(57.25,66.775)
  Bottom Layer w0.254: v1(57.25,66.775) 59.4,68.925 66.975,68.925 70.03,71.98 JTAG_Con.4
NetJTAG_Con_6: JTAG_Con.6 U1.49 | length 13.8
  Top Layer w0.254: U1.49 59.73,64.425 JTAG_Con.6
NetJTAG_Con_8: JTAG_Con.8 U1.50 | length 13.7
  Top Layer w0.254: U1.50 58.25,65.575 58.675,66 60.035,66 JTAG_Con.8
NetP1_1: P1.1 R16.1 U1.20 | length 55.5
  Top Layer w0.254: R16.1@31.37,79.805 P1.1 ; v1(42.5,51.925) 42.525,51.925 43.625,50.825 52.139,50.825 52.75,51.436 U1.20
  Bottom Layer w0.254: P1.1 31.37,74.155 35.725,69.8 35.725,53.325 37.125,51.925 v1@42.525,51.925
NetP1_2: P1.2 U1.23 | length 52.4
  Top Layer w0.254: v1(37.3,53.35) 40.725,49.925 53.15,49.925 54.25,51.025 U1.23
  Bottom Layer w0.254: P1.2 33.91,79.315 37.325,75.9 v1@37.325,53.35
NetP1_3: P1.3 U1.19 | length 46.6
  Top Layer w0.254: v1(38.475,54.225) 42.25,54.225 45.2,51.275 51.775,51.275 52.25,51.75 U1.19
  Bottom Layer w0.254: P1.3 36.45,79.6 38.475,77.575 v1(38.475,54.225)
NetP1_4: P1.4 U1.22 | length 48.7
  Top Layer w0.254: v1(40.6,52.9) 40.6,51.75 41.95,50.4 52.625,50.4 53.75,51.525 U1.22
  Bottom Layer w0.254: P1.4 38.99,79.135 41.3,76.825 41.3,53.6 v1(40.6,52.9)
NetP1_5: P1.5 R4.2 | length 3.5
  Top Layer w0.254: R4.2@41.53,79.78 P1.5
NetP1_6: P1.6 R6.2 | length 3.5
  Top Layer w0.254: R6.2@44.07,79.78 P1.6
NetP2_1: P2.1 R5.2 | length 3.6
  Top Layer w0.254: R5.2 60.834,79.784 P2.1
NetP2_3: P2.3
NetP3_1: P3.1 U1.14 | length 36.8
  Top Layer w0.254: v1(45.825,55) 47.025,55 48.1,56.075 U1.14 ; P3.1@55.226,82.751 P3.1
  Bottom Layer w0.254: v1(45.825,55) 45.825,56.025 46.125,56.325 46.125,66.425 55.226,75.526 P3.1
NetP3_2: P3.2 U1.13 | length 34.7
  Top Layer w0.254: v1(46.825,56) 46.875,56 47.45,56.575 U1.13
  Bottom Layer w0.254: v1(46.825,56) 47.3,56.475 47.3,65.875 57.766,76.341 P3.2
NetP4_1: P4.1 R14.2 | length 4.5
  Top Layer w0.254: R14.2 70.3,36.95 71.7,35.55 P4.1
NetP4_2: P4.2 R13.2 | length 4.1
  Top Layer w0.254: R13.2 71.85,36.925 72.35,36.425 P4.2
NetP4_3: P4.3 R12.2 | length 4.1
  Top Layer w0.254: P4.3 73,36.4 73.4,36.8 R12.2
NetP4_4: P4.4 R11.2 | length 4.5
  Top Layer w0.254: P4.4 73.64,36.115 74.95,37.425 R11.2
NetR1_1: R1.1 R9.1 U1.32 | length 53.5
  Top Layer w0.254: v1(39.3,50.075) 48.875,40.5 R9.1 53.725,40.5 58.75,45.525 U1.32 ; v1(39.975,68.05) R1.1
  PotSig w0.254: v1(39.3,50.075) v1(39.3,53.275)
  Bottom Layer w0.254: v1(39.3,53.275) 40,53.975 40,62.525 40.675,63.2 40.675,66.5 39.975,67.2 v1(39.975,68.05)
NetR3_1: R3.1 S1.2 | length 2.7
  Top Layer w0.254: R3.1@39.965,71.085 S1.2
NetR4_1: R4.1 U1.61 | length 18.9
  Top Layer w0.254: R4.1 42.625,77.175 v1(42.625,75.625) ; v1(47.75,70.5) 48.375,70.5 52.75,66.125 U1.61
  Bottom Layer w0.254: v1(42.625,75.625) v1(47.75,70.5)
NetR5_1: R5.1 U1.62 | length 19.4
  Top Layer w0.254: v1(50.425,66.825) 51,66.825 52.25,65.575 U1.62 ; v1(59.075,76.75) 60.6,78.275 R5.1
  Bottom Layer w0.254: v1(50.425,66.825) 59.075,75.475 v1(59.075,76.75) v1@59.075,76.775
NetR6_1: R6.1 U1.64 | length 16.8
  Top Layer w0.254: R6.1 44.075,71.6 U1.64
NetR7_2: R7.2 U1.40 | length 2.9
  Top Layer w0.254: U1.40 R7.2@63.5,58.575
NetR8_2: R8.2 SW1.1 SW1.2 | length 9.6
  Top Layer w0.254: SW1.2 SW1.1 R8.2
NetR9_2: R9.2 WAKE.1 WAKE.2 | length 9.7
  Top Layer w0.254: WAKE.2 WAKE.1 R9.2@53.087,38.987
NetR11_1: R11.1 U1.45 | length 27.6
  Top Layer w0.254: U1.45 62.1,61.075 v1@62.375,60.8 ; v1(70.3,49.35) 70.3,49.3 74.95,44.65 R11.1
  Bottom Layer w0.254: v1(62.4,60.8) 70.3,52.9 v1(70.3,49.35)
NetR12_1: R12.1 U1.44 | length 28.7
  Top Layer w0.254: v1(58.775,60.9) 59.1,60.575 U1.44 ; v1(68.675,49.35) 73.4,44.625 R12.1
  Bottom Layer w0.254: v1(58.775,60.9) 68.675,51 v1(68.675,49.35)
NetR13_1: R13.1 U1.43 | length 26.9
  Top Layer w0.254: v1@58.775,59.725 59.125,60.075 U1.43 ; v1(67.05,49.425) 71.85,44.625 R13.1
  Bottom Layer w0.254: v1(58.75,59.725) 67.05,51.425 v1(67.05,49.425)
NetR14_1: R14.1 U1.46 | length 32.9
  Top Layer w0.254: U1.46 61.9,61.575 v1(62.4,62.075) ; v1(65.625,49.375) 70.3,44.7 R14.1
  Bottom Layer w0.254: v1(62.4,62.075) 62.025,61.7 58.525,61.7 57.85,61.025 57.85,59.475 65.625,51.7 v1(65.625,49.375)
pads on no net: JTAG_Con.7 P4. U1.5 U1.10 U1.21 U1.24 U1.29 U1.30 U1.31 U1.33 U1.53 U1.63 Y2.3 Y2.4

## Polygon pours and split planes (outlines as drawn)
+3.3 on PotSig "3.3Pot" (solid, remove dead copper, pour order 11): 30,84.975 30,30 80,30 79.975,30.025 79.975,85
DGND on Top Layer "TopGnd" (solid, remove dead copper, pour order 11): 30,84.975 30,30 80,30 79.975,30.025 79.975,85
DGND on Bottom Layer "BotGnd" (solid, remove dead copper, pour order 11): 30,84.975 30,30 80,30 79.975,30.025 79.975,85
DGND on GP1 (split plane): 79.49,30.51 30.51,30.51 30.51,84.49 79.49,84.49

## Silkscreen, mask and mechanical layers (free items; w line width, h text height)
Mechanical 13:
  the board outline again, w0.254

## Text inside footprints (layer, text, board x,y; h text height)
JTAG_Con: Top Overlay "1" at 73.3,75.225 h1 r180; Top Overlay "9" at 64.65,75.225 h1 r180
U1: Top Overlay "PN" at 55,58.825 h0.7